# EAGLE board Board (EAGLE 9.5.2)
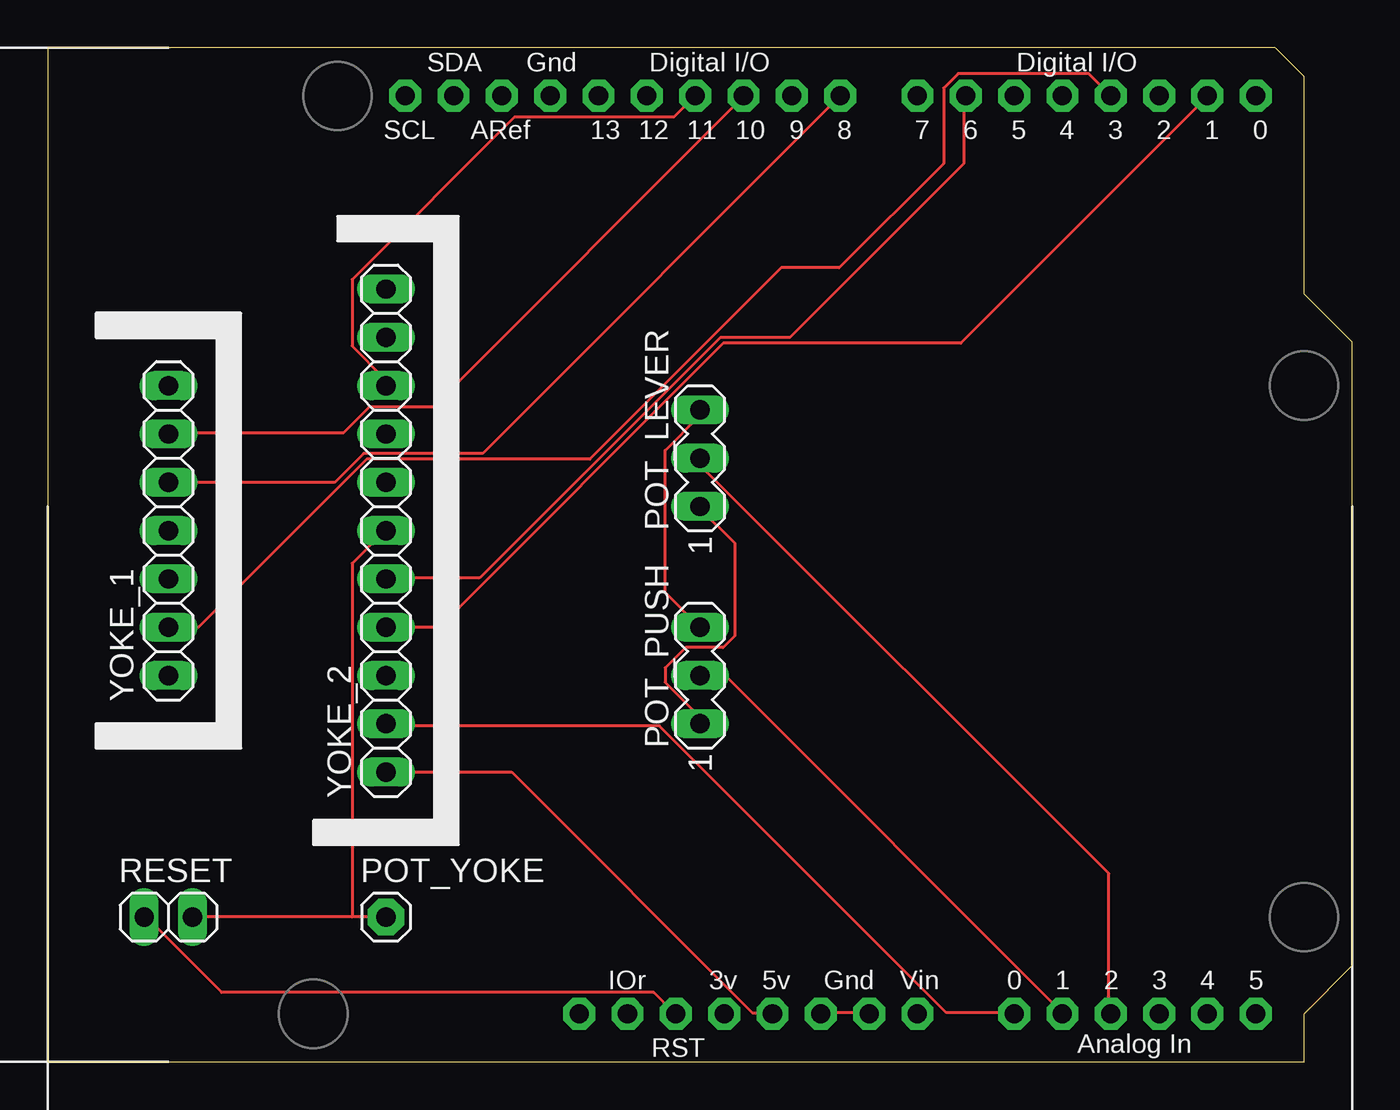
[diagram p0: board, top side]
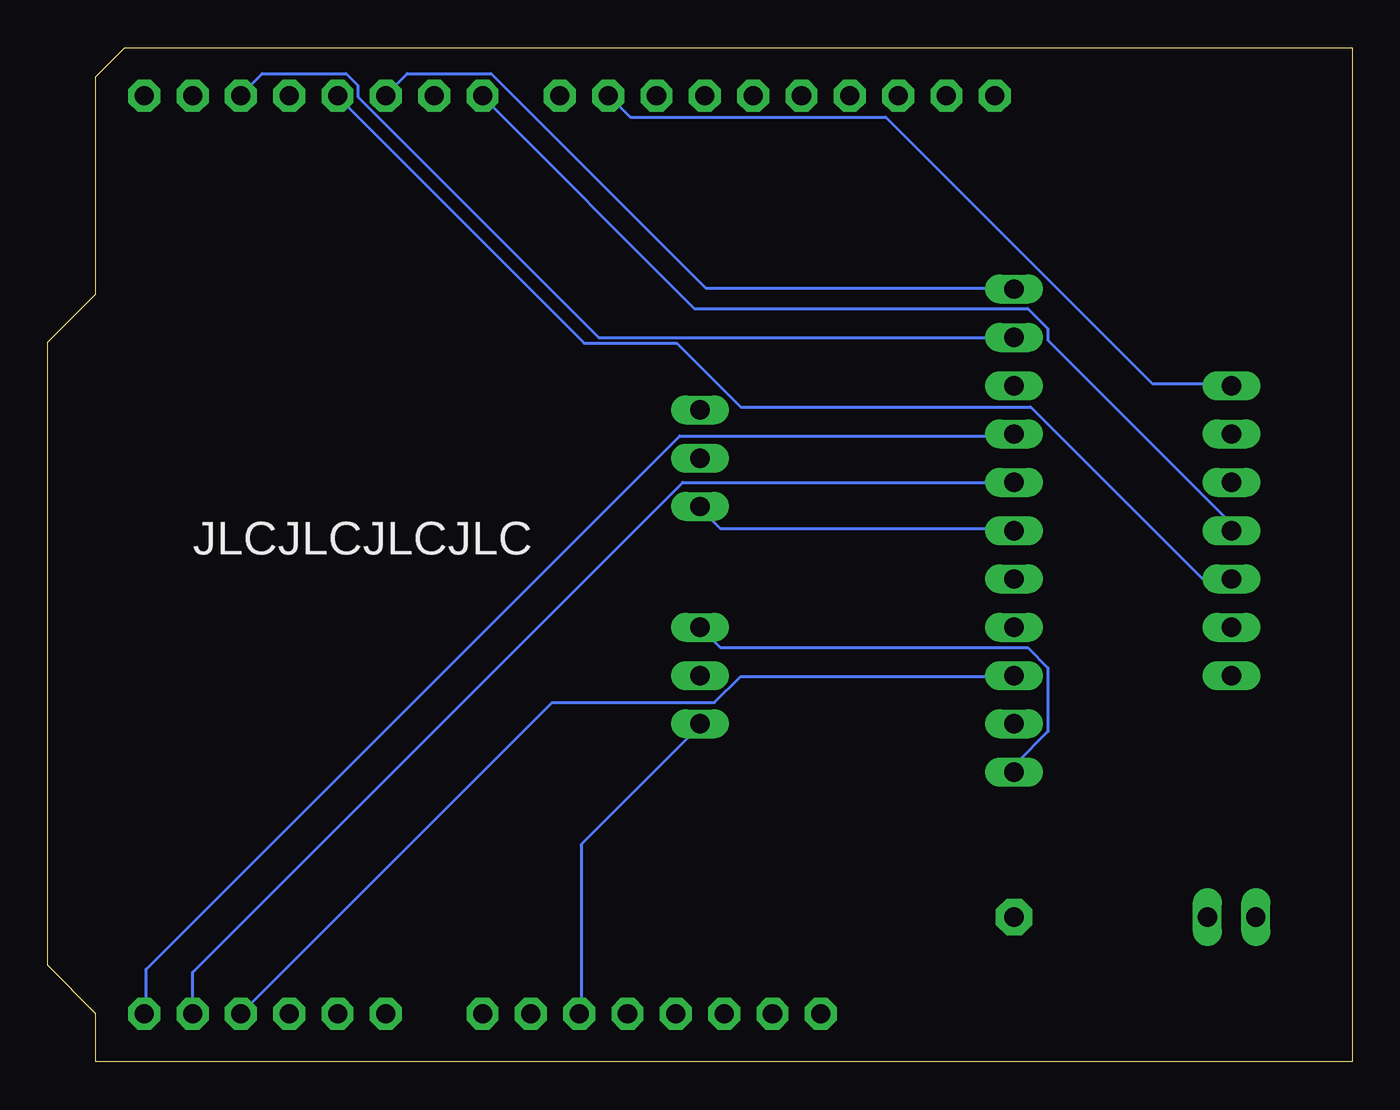
[diagram p1: board, bottom side, seen from below]

Size 68.58 x 53.34 mm. Coordinates in mm from the lower left corner, seen from the top.
Copper layers (1*16): Top 0.035mm / dielectric 1.5mm / Bottom 0.035mm
Design rules "default": minimum track width 6mil, minimum drill 0.35mm, track to track 6mil, track to pad 6mil, pad to pad 6mil, via to via 6mil, smd to smd 6mil, copper to edge 40mil, drill to drill 6mil, minimum pad ring 10mil, minimum via ring 8mil, stop-mask expansion 4mil, vias tented up to drill 0mil, thermal gap 10mil

## Footprints (pad centres in the part's own frame; a part is rotated, then mirrored left to right if it is on the bottom)
ARDUINOR3 = drill 1 pad 1.676 octagon: 3V 35.56,2.54; 5V 38.1,2.54; A0 50.8,2.54; A1 53.34,2.54; A2 55.88,2.54; A3 58.42,2.54; A4 60.96,2.54; A5 63.5,2.54; AREF 23.876,50.8; D0 63.5,50.8; D1 60.96,50.8; D2 58.42,50.8; D3 55.88,50.8; D4 53.34,50.8; D5 50.8,50.8; D6 48.26,50.8; D7 45.72,50.8; D8 41.656,50.8; D9 39.116,50.8; D10 36.576,50.8; D11 34.036,50.8; D12 31.496,50.8; D13 28.956,50.8; GND 26.416,50.8; GND1 43.18,2.54; GND2 40.64,2.54; IOREF 30.48,2.54; RESERVED 27.94,2.54; RESET 33.02,2.54; SCL 18.796,50.8; SDA 21.336,50.8; VIN 45.72,2.54
MA03-1 = drill 1.016 long: 1 -2.54,0; 2 0,0; 3 2.54,0
1X01 = drill 1.016 pad 1.93 octagon: 1 0,0
1X02 = drill 1.016 long: 1 -1.27,0; 2 1.27,0
1X07 = drill 1.016 long: 1 -7.62,0; 2 -5.08,0; 3 -2.54,0; 4 0,0; 5 2.54,0; 6 5.08,0; 7 7.62,0
1X11 = drill 1.016 long: 1 -12.7,0; 2 -10.16,0; 3 -7.62,0; 4 -5.08,0; 5 -2.54,0; 6 0,0; 7 2.54,0; 8 5.08,0; 9 7.62,0; 10 10.16,0; 11 12.7,0

## Placement (x,y rotation side)
E$1  [ARDUINOR3]  0,0 0 top
POT_LEVER  [MA03-1]  34.29,31.75 90 top
POT_PUSH  [MA03-1]  34.29,20.32 90 top
POT_YOKE  [1X01]  17.78,7.62 0 top
RESET  [1X02]  6.35,7.62 0 top
YOKE_1  [1X07]  6.35,27.94 90 top
YOKE_2  [1X11]  17.78,27.94 90 top

## Library data of the parts
E$1 POT_YOKE = adafruit
POT_LEVER POT_PUSH = con-lstb
RESET YOKE_1 YOKE_2 = pinhead

## Nets
S$1: E$1.D9 YOKE_1.7
S$2: E$1.D10 YOKE_1.6
S$4: E$1.D8 YOKE_1.5
S$5: E$1.D7 YOKE_1.4
S$6: E$1.D4 YOKE_1.3
S$7: E$1.D3 YOKE_1.2
S$8: E$1.D5 YOKE_2.11
S$9: E$1.D2 YOKE_2.10
S$10: E$1.D11 YOKE_2.9
S$11: E$1.A5 YOKE_2.8
S$12: E$1.A4 YOKE_2.7
S$13: E$1.D6 YOKE_2.5
S$14: E$1.D1 YOKE_2.4
S$15: E$1.A3 YOKE_2.3
S$16: E$1.A0 YOKE_2.2
S$18: E$1.RESET RESET.1
S$19: E$1.5V POT_LEVER.3 POT_PUSH.3 YOKE_2.1
S$20: E$1.GND1 E$1.GND2 POT_LEVER.1 POT_PUSH.1 POT_YOKE.1 RESET.2 YOKE_2.6
S$21: E$1.A1 POT_PUSH.2
S$22: E$1.A2 POT_LEVER.2

## Tracks (layer width: path | path; a pad name or v marks a point on that pad's centre or on a via)
S$1
  Bottom 0.152: YOKE_1.7 6.4,35.66 10.52,35.66 24.54,49.68 37.95,49.68 39.01,50.75 E$1.D9
S$2
  Top 0.152: YOKE_1.6 6.4,33.07 15.54,33.07 16.92,34.44 20.27,34.44 36.58,50.75 E$1.D10
S$4
  Top 0.152: YOKE_1.5 15.09,30.48 16.61,32 22.86,32 E$1.D8
S$5
  Bottom 0.152: YOKE_1.4 6.4,28.04 6.4,28.35 16,37.95 16,38.56 17.07,39.62 34.59,39.62 45.72,50.75 E$1.D7
S$6
  Bottom 0.152: YOKE_1.3 6.4,25.45 7.92,25.45 16.92,34.44 32.16,34.44 35.51,37.8 40.39,37.8 53.34,50.75 E$1.D4
S$7
  Top 0.152: YOKE_1.2 7.92,22.86 16.76,31.7 28.5,31.7 38.56,41.76 41.6,41.76 47.09,47.24 47.09,51.21 47.85,51.97 54.71,51.97 E$1.D3
S$8
  Bottom 0.152: YOKE_2.11 17.83,40.69 33.98,40.69 45.26,51.97 49.68,51.97 50.75,50.9 E$1.D5
S$9
  Bottom 0.152: YOKE_2.10 39.62,38.1 52.27,50.75 52.27,51.36 52.88,51.97 57.3,51.97 58.37,50.9 E$1.D2
S$10
  Top 0.152: E$1.D11 32.92,49.68 24.54,49.68 16,41.15 16,37.64 17.68,35.97 17.68,35.66 YOKE_2.9
S$11
  Bottom 0.152: YOKE_2.8 17.83,32.92 35.36,32.92 63.4,4.88 63.4,2.59 E$1.A5
S$12
  Bottom 0.152: YOKE_2.7 35.2,30.48 60.96,4.72 E$1.A4
S$13
  Top 0.152: YOKE_2.5 17.83,25.45 22.71,25.45 35.36,38.1 39.01,38.1 48.16,47.24 48.16,50.75 E$1.D6
S$14
  Top 0.152: YOKE_2.4 20.57,22.86 35.51,37.8 48.01,37.8 60.96,50.75 E$1.D1
S$15
  Bottom 0.152: E$1.A3 42.06,18.9 33.53,18.9 32.16,20.27 17.83,20.27 YOKE_2.3
S$16
  Top 0.152: YOKE_2.2 17.83,17.68 32.16,17.68 47.24,2.59 50.75,2.59 E$1.A0
S$18
  Top 0.152: RESET.1 5.18,7.62 9.14,3.66 31.85,3.66 32.92,2.59 E$1.RESET
S$19
  Top 0.152: POT_LEVER.3 34.29,33.98 32.46,32.16 32.46,24.69 POT_PUSH.3 | YOKE_2.1 24.38,15.24 37.03,2.59 38.1,2.59 E$1.5V
  Bottom 0.152: POT_PUSH.3 33.22,21.79 17.07,21.79 16,20.73 16,17.37 17.68,15.7 17.68,15.24 YOKE_2.1
S$20
  Top 0.152: POT_YOKE.1 16,7.62 | 16,7.62 RESET.2 | E$1.GND2 40.69,2.59 43.13,2.59 E$1.GND1 | POT_PUSH.1 34.29,18.14 32.46,19.96 32.46,20.73 33.53,21.79 35.51,21.79 36.12,22.4 36.12,27.28 34.29,29.11 POT_LEVER.1 | 16,7.62 16,26.21 17.68,27.89 YOKE_2.6
  Bottom 0.152: YOKE_2.6 17.83,28.04 33.22,28.04 34.29,29.11 POT_LEVER.1 | E$1.GND2 40.54,2.59 40.54,11.43 34.29,17.68 POT_PUSH.1
S$21
  Top 0.152: POT_PUSH.2 34.29,20.27 35.66,20.27 53.34,2.59 E$1.A1
S$22
  Top 0.152: POT_LEVER.2 34.29,31.39 55.78,9.91 55.78,2.59 E$1.A2

## Text on the board
bPlace: JLCJLCJLCJLC